# Altium PCB Archim_TF_Top.PcbDoc
Units mil, origin at the board's own origin, x right, y up, seen from the top; angles counter-clockwise.
Board outline 5100 x 5050 mil, 2 copper layers (Top Layer, Bottom Layer); 36 components, 36 nets, 37 pads, 0 vias.
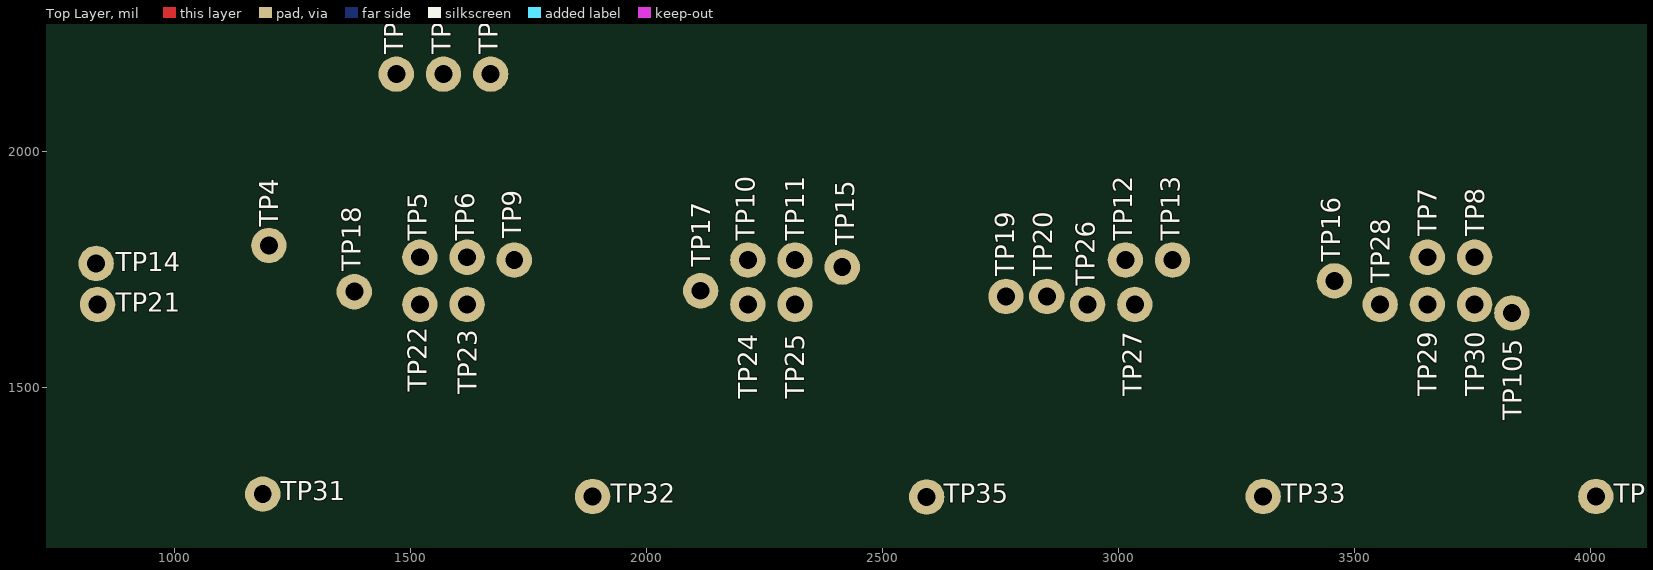
[diagram p0: Top Layer view]
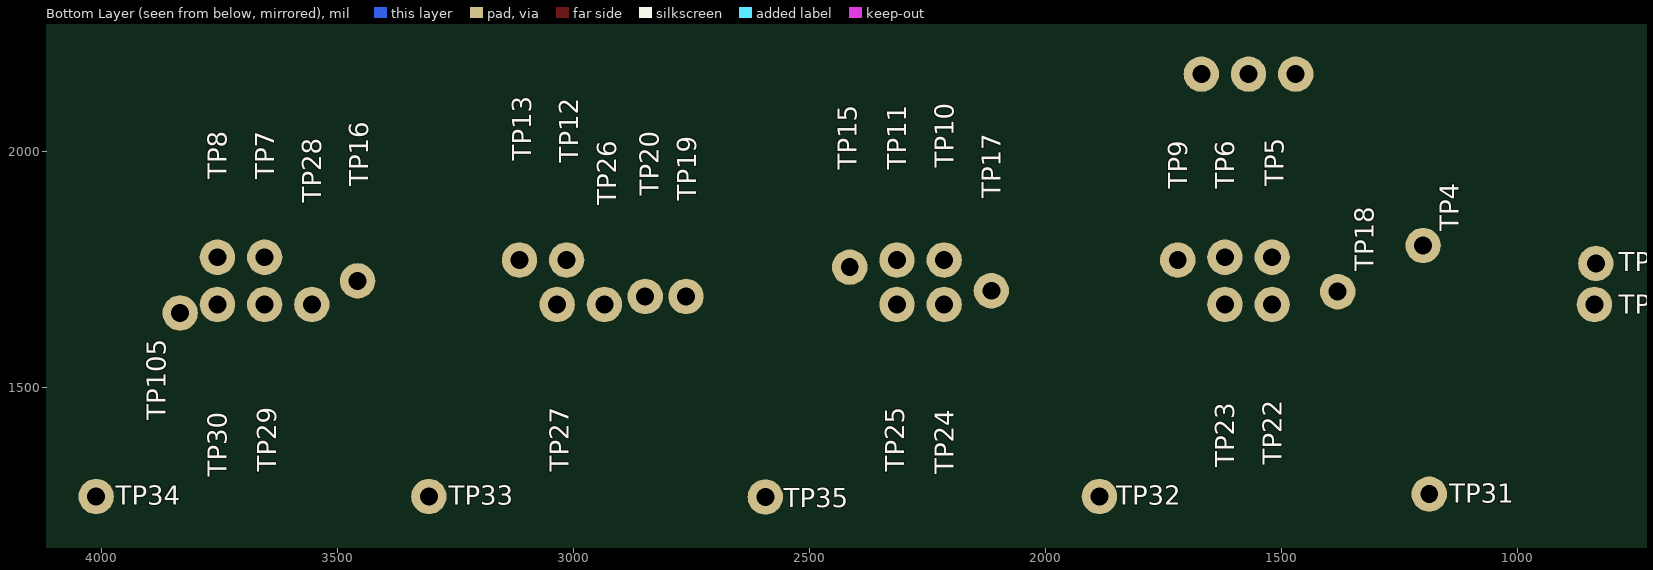
[diagram p1: Bottom Layer view, seen from below]

## Layer stack, top to bottom
Top Solder: solder mask 0.4, Solder Resist, Dk 3.5
Top Layer: signal copper 1.4
Dielectric 1: dielectric 12.6, FR-4, Dk 4.8
Bottom Layer: signal copper 1.4
Bottom Solder: solder mask 0.4, Solder Resist, Dk 3.5

## Board outline
0,0 0,5050 5100,5050 5100,0

## Design rules (kind name [scope] priority, off if disabled: settings)
Clearance [All] p1: gap=6
ComponentClearance [All] p1 off: gap=10 collisioncheckmode=3 verticalgap=10 showdistances=FALSE
PolygonConnect [All] p1: connectstyle=Relief reliefconductorwidth=10 reliefentries=4 polygonreliefangle="90 Angle" airgapwidth=10
RoutingVias [All] p1: holewidth=28 width=50 viastyle="Through Hole" minholewidth=28 minwidth=50 maxholewidth=28 maxwidth=50
SolderMaskExpansion [All] p1: expansion=4
Width [All] p1: maxlimit=1000 minlimit=6 preferedwidth=10
29 further rules are at their usual default settings.

## Components (designator, comment, footprint, x,y, rotation, side; value= is the part's Value field where it differs from the comment)
TP1 "P100-T" POGO_38 1470,2163 r180 top
TP2 "P100-T" POGO_38 1570,2163 r180 top
TP3 "P100-T" POGO_38 1670,2163 r180 top
TP4 "P100-T" POGO_38 1200,1800 r180 top
TP5 "P100-T" POGO_38 1520,1775 r180 top
TP6 "P100-T" POGO_38 1620,1775 r180 top
TP7 "P100-T" POGO_38 3655,1775 r180 top
TP8 "P100-T" POGO_38 3755,1775 r180 top
TP9 "P100-T" POGO_38 1720,1769 r180 top
TP10 "P100-T" POGO_38 2215,1769 r90 top
TP11 "P100-T" POGO_38 2315,1769 r90 top
TP12 "P100-T" POGO_38 3015,1769 r180 top
TP13 "P100-T" POGO_38 3115,1769 r180 top
TP14 "P100-T" POGO_38 834,1762 r180 top
TP15 "P100-T" POGO_38 2415,1754 r90 top
TP16 "P100-T" POGO_38 3458,1725 r180 top
TP17 "P100-T" POGO_38 2115,1704 r90 top
TP18 "P100-T" POGO_38 1381,1702 r180 top
TP19 "P100-T" POGO_38 2762,1692 r180 top
TP20 "P100-T" POGO_38 2848.5,1692 r180 top
TP21 "P100-T" POGO_38 837,1675 r180 top
TP22 "P100-T" POGO_38 1520,1675 r180 top
TP23 "P100-T" POGO_38 1620,1675 r180 top
TP24 "P100-T" POGO_38 2215,1675 r90 top
TP25 "P100-T" POGO_38 2315,1675 r180 top
TP26 "P100-T" POGO_38 2935,1675 r180 top
TP27 "P100-T" POGO_38 3035,1675 r180 top
TP28 "P100-T" POGO_38 3555,1675 r180 top
TP29 "P100-T" POGO_38 3655,1675 r180 top
TP30 "P100-T" POGO_38 3755,1675 r180 top
TP31 "P100-T" POGO_38 1187,1273 r90 top
TP32 "P100-T" POGO_38 1886,1268 r90 top
TP33 "P100-T" POGO_38 3307,1268 r90 top
TP34 "P100-T" POGO_38 4012,1268 r90 top
TP35 "P100-T" POGO_38 2594,1267 r90 top
TP105 "P100-T" POGO_38 3834,1657 r90 top

## Footprints (in the part's own frame and the unit in brackets; to place one, negate y for a bottom-side part, rotate by r counter-clockwise, add the part's x,y. Pads: shape width x height; smd on the part's side, far side on the other; paste and mask are expansions set on the pad)
POGO_38 [mil]
  round 75 hole 38: 1(0,0)

## Part data
TP1 TP2 TP3 TP4 TP5 TP6 TP7 TP8 TP9 TP10 TP11 TP12 TP13 TP14 TP15 TP16 TP17 TP18 TP19 TP20 TP21 TP22 TP23 TP24 TP25 TP26 TP27 TP28 TP29 TP30 TP31 TP32 TP33 TP34 TP35 TP105: library part TestPoint, "Test Point"

## Free pads (board coordinates)
  round 60 on Mech16: 0(1187,1273)

## Nets (pads, with @x,y where several pads share a name; then routed paths per layer and width w, separated by ;. In a path a pad name is that pad's centre, name@x,y a point inside that pad or via, vN(x,y) a via of type N, cw(c..) or ccw(c..) an arc to the next point about the centre after c; other vN are vias at no path point)
NetTP1_1: TP1.1
NetTP2_1: TP2.1
NetTP3_1: TP3.1
NetTP4_1: TP4.1
NetTP5_1: TP5.1
NetTP6_1: TP6.1
NetTP7_1: TP7.1
NetTP8_1: TP8.1
NetTP9_1: TP9.1
NetTP10_1: TP10.1
NetTP11_1: TP11.1
NetTP12_1: TP12.1
NetTP13_1: TP13.1
NetTP14_1: TP14.1
NetTP15_1: TP15.1
NetTP16_1: TP16.1
NetTP17_1: TP17.1
NetTP18_1: TP18.1
NetTP19_1: TP19.1
NetTP20_1: TP20.1
NetTP21_1: TP21.1
NetTP22_1: TP22.1
NetTP23_1: TP23.1
NetTP24_1: TP24.1
NetTP25_1: TP25.1
NetTP26_1: TP26.1
NetTP27_1: TP27.1
NetTP28_1: TP28.1
NetTP29_1: TP29.1
NetTP30_1: TP30.1
NetTP31_1: TP31.1
NetTP32_1: TP32.1
NetTP33_1: TP33.1
NetTP34_1: TP34.1
NetTP35_1: TP35.1
NetTP105_1: TP105.1

## Silkscreen, mask and mechanical layers (free items; w line width, h text height)
Top Overlay:
  text "Solder Side" at 1940,635 h100
  text "This Test Fixture built for Archim 0.3b" at 1763,550 h40
Bottom Overlay:
  text "TP2" at 1545,2320 h40 r270
  text "TP3" at 1650,2320 h40 r270
  text "TP1" at 1445,2315 h40 r270
  text "TP13" at 3090,1980 h40 r270
  text "TP12" at 2990,1975 h40 r270
  text "TP10" at 2195,1965 h40 r270
  text "TP11" at 2295,1960 h40 r270
  text "TP15" at 2400,1960 h40 r270
  text "TP7" at 3635,1940 h40 r270
  text "TP8" at 3735,1940 h40 r270
  text "TP5" at 1495,1925 h40 r270
  text "TP16" at 3435,1925 h40 r270
  text "TP6" at 1600,1920 h40 r270
  text "TP9" at 1700,1920 h40 r270
  text "TP20" at 2820,1905 h40 r270
  text "TP17" at 2095,1900 h40 r270
  text "TP19" at 2740,1895 h40 r270
  text "TP28" at 3535,1890 h40 r270
  text "TP26" at 2910,1885 h40 r270
  text "TP4" at 1125,1830 h40 r270
  text "TP14" at 785,1745 h40
  text "TP18" at 1305,1745 h40 r270
  text "TP21" at 785,1655 h40
  text "TP105" at 3865,1430 h40 r270
  text "TP22" at 1500,1335 h40 r270
  text "TP23" at 1600,1330 h40 r270
  text "TP25" at 2300,1320 h40 r270
  text "TP27" at 3010,1320 h40 r270
  text "TP29" at 3630,1320 h40 r270
  text "TP24" at 2195,1315 h40 r270
  text "TP30" at 3735,1310 h40 r270
  text "TP31" at 1145,1255 h40
  text "TP32" at 1850,1250 h40
  text "TP33" at 3265,1250 h40
  text "TP34" at 3970,1250 h40
  text "TP35" at 2555,1245 h40
  text "Pogo Pin Side" at 2575,290 h100
DUT Outline:
  lines w10: 500,500 4600,500 4600,4550 500,4550 500,500
Outline:
  the board outline again, w10